# EAGLE board F8OICCNICG2AJKW (EAGLE 5.07)
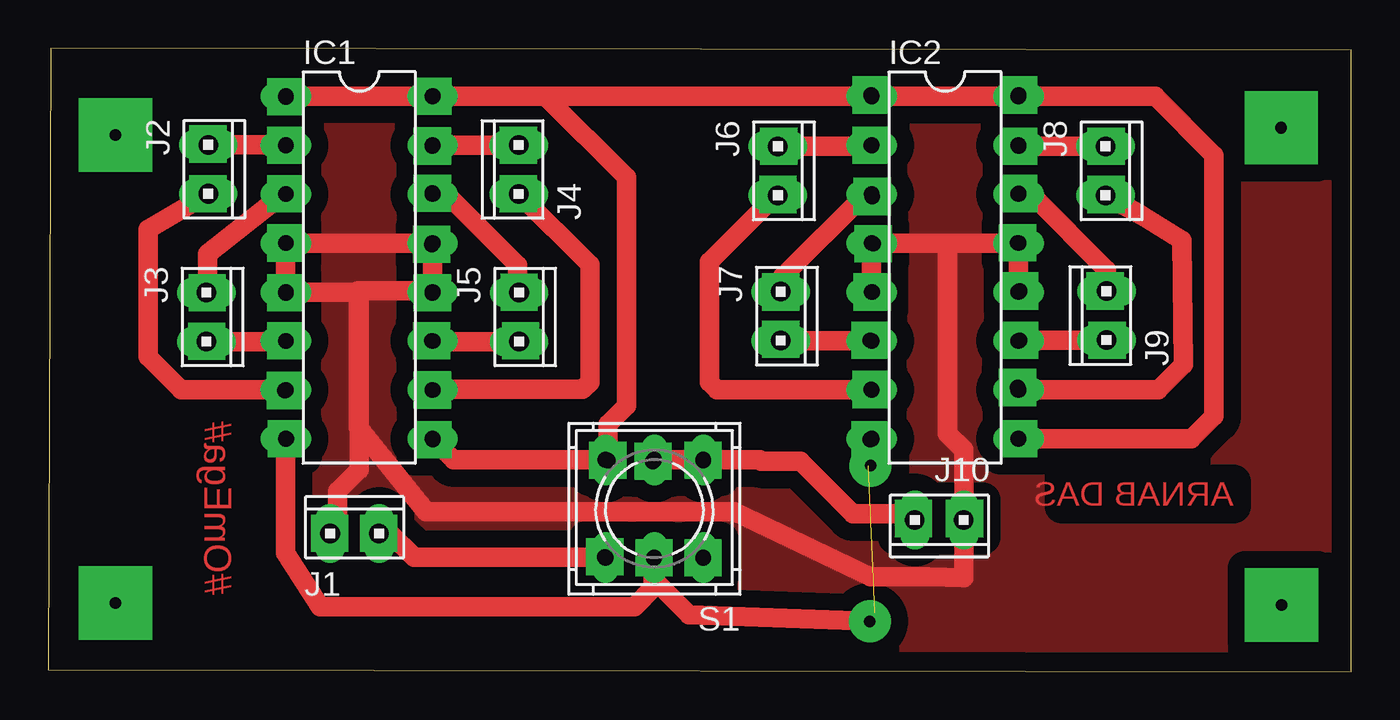
[diagram p0: board, top side]

Size 67.67 x 32.37 mm. Coordinates in mm from the lower left corner, seen from the top.
Outline: 0,0.11 67.67,0 67.66,32.26 0.14,32.37 0,0.11
Copper layers (1*16): Top 0.035mm / dielectric 1.5mm / Bottom 0.035mm
Design rules "default *": minimum track width 10mil, minimum drill 24mil, track to track 35mil, track to pad 35mil, pad to pad 8mil, via to via 8mil, smd to smd 8mil, copper to edge 40mil, drill to drill 8mil, minimum pad ring 10mil, minimum via ring 8mil, stop-mask expansion 4mil, vias tented up to drill 0mil, thermal gap 10mil

## Footprints (pad centres in the part's own frame; a part is rotated, then mirrored left to right if it is on the bottom)
DIL16 = drill 0.813 long: 1 -8.89,-3.81; 2 -6.35,-3.81; 3 -3.81,-3.81; 4 -1.27,-3.81; 5 1.27,-3.81; 6 3.81,-3.81; 7 6.35,-3.81; 8 8.89,-3.81; 9 8.89,3.81; 10 6.35,3.81; 11 3.81,3.81; 12 1.27,3.81; 13 -1.27,3.81; 14 -3.81,3.81; 15 -6.35,3.81; 16 -8.89,3.81
10X02MTA = drill 1.016 long: 1 1.27,0; 2 -1.27,0
9077-2 = drill 0.813 long: 1 -2.54,2.54; 2 0,2.54; 3 2.54,2.54; 4 -2.54,-2.54; 5 0,-2.54; 6 2.54,-2.54

## Placement (x,y rotation side)
IC1  L293D  [DIL16]  16.15,20.98 270 top
IC2  L293D  [DIL16]  46.57,20.98 270 top
J1  1  [10X02MTA]  15.91,7.17 0 top
J2  1  [10X02MTA]  8.31,26.08 270 top
J3  1  [10X02MTA]  8.22,18.41 270 top
J4  1  [10X02MTA]  24.43,26.06 90 top
J5  1  [10X02MTA]  24.45,18.41 270 top
J6  1  [10X02MTA]  37.89,26 270 top
J7  1  [10X02MTA]  38.04,18.46 270 top
J8  1  [10X02MTA]  54.9,26 270 top
J9  1  [10X02MTA]  54.95,18.48 90 top
J10  1  [10X02MTA]  46.27,7.88 180 top
S1  9077-2  [9077-2]  31.48,8.46 180 top

## Library data of the parts
IC1 IC2 = st-microelectronics
J1-J10 = con-amp
S1 = switch-misc

## Nets
GND: IC1.4 IC1.5 IC1.12 IC1.13 IC2.4 IC2.5 IC2.12 IC2.13 J1.2 J10.2
N$2: IC1.2 J2.2
N$3: IC1.7 J2.1
N$4: IC1.3 J3.2
N$5: IC1.6 J3.1
N$6: IC1.8 IC2.8 S1.2
N$7: IC1.1 IC1.9 IC1.16 IC2.1 IC2.9 IC2.16 S1.6
N$8: IC1.11 J5.1
N$9: IC1.14 J5.2
N$10: IC1.15 J4.1
N$11: IC1.10 J4.2
N$12: IC2.2 J6.2
N$13: IC2.7 J6.1
N$14: IC2.3 J7.2
N$15: IC2.6 J7.1
N$16: IC2.10 J8.1
N$17: IC2.15 J8.2
N$18: IC2.14 J9.1
N$19: IC2.11 J9.2
N$21: J1.1 S1.3
N$22: J10.1 S1.5

## Tracks (layer width: path | path; a pad name or v marks a point on that pad's centre or on a via)
GND
  Top 1.016: IC2.5 IC2.4 46.89,22.25 | 46.89,22.25 IC2.13 IC2.12 | 46.89,22.25 46.71,22.07 46.71,12.35 47.54,11.52 J10.2 47.56,7.86 47.56,4.87 45.67,4.94 42.7,4.94 35.65,8.3 19.62,8.3 16.1,12.68 16.1,19.78 16.12,19.77 19.9,19.77 19.96,19.83 IC1.13 | IC1.13 IC1.12 | IC1.13 IC1.4 IC1.5 16.15,19.71 16.15,19.7 16.15,10.48 15.04,9.36 15.04,7.57 J1.2
  pour Top: 0.91,31.29 4.91,31.35 5.71,31.14 63.28,31.59 66.38,31.58 66.75,31.35 66.75,0.66 61.27,0.77 58.2,0.64 0.71,0.76 0.82,5.32 0.91,6.29
N$1  (via drill 0.6 pad 2.18)
  other vias: 42.66,2.62
N$2
  Top 1.016: J2.2 12.32,27.35 IC1.2
N$3
  Top 1.016: J2.1 7.08,24.08 5.2,22.96 5.2,16.34 6.91,14.63 IC1.7
N$4
  Top 1.016: IC1.3 12.11,24.7 8.27,21.69 8.27,20.32 J3.2
N$5
  Top 1.016: J3.1 12.31,17.14 IC1.6
N$6  (1 unrouted)
  Top 1.016: IC1.8 12.34,6.16 14.11,3.38 27.46,3.38 30.44,3.38 31.4,4.35 31.4,5.84 S1.2 31.48,4.76 33.28,2.96 42.7,2.62 42.93,3.07 | IC2.8 42.76,10.87 42.59,10.7
N$7
  Top 1.016: IC1.16 IC1.1 | IC1.16 IC2.1 IC2.16 57.48,29.87 60.53,26.81 60.53,13.25 59.36,12.08 IC2.9 | IC1.9 21.05,11 S1.6 29.07,11.13 29.07,12.85 30.02,13.8 30.02,25.66 25.81,29.87 IC1.16
N$8
  Top 1.016: J5.1 19.99,17.14 IC1.11
N$9
  Top 1.016: IC1.14 20.68,24.79 24.37,21.1 24.37,19.76 J5.2
N$10
  Top 1.016: J4.1 IC1.15
N$11
  Top 1.016: J4.2 24.45,24.79 28.13,21.11 28.13,15.04 27.75,14.66 19.99,14.66 IC1.10
N$12
  Top 1.016: J6.2 42.7,27.27 IC2.2
N$13
  Top 1.016: J6.1 37.79,24.73 34.34,21.28 34.34,15.03 34.74,14.64 IC2.7
N$14
  Top 1.016: IC2.3 42.43,24.79 38.13,20.49 38.13,19.82 J7.2
N$15
  Top 1.016: J7.1 42.74,17.19 IC2.6
N$16
  Top 1.016: J8.1 56.81,23.67 58.88,22.4 58.94,15.93 57.66,14.64 50.39,14.64 IC2.10
N$17
  Top 1.016: J8.2 50.44,27.27 IC2.15
N$18
  Top 1.016: J9.1 54.95,20.87 51.13,24.69 50.48,24.69 IC2.14
N$19
  Top 1.016: J9.2 50.43,17.21 IC2.11
N$21
  Top 1.016: J1.1 17.75,7.17 18.99,5.93 28.92,5.93 S1.3
N$22
  Top 1.016: S1.5 36.95,11 37.03,10.92 39.07,10.92 41.8,8.19 44.69,8.19 J10.1
N$24  (via drill 0.6 pad 3.81)
  other vias: 3.5,27.86
N$25  (via drill 0.6 pad 3.81)
  other vias: 64.03,28.23
N$26  (via drill 0.6 pad 3.81)
  other vias: 3.5,3.58
N$27  (via drill 0.6 pad 3.81)
  other vias: 64.04,3.46
N$28  (via drill 0.6 pad 2.18)
  other vias: 42.71,10.7
N$29  (via drill 0.8 pad 1.93)
  other vias: 12.34,29.84
N$30  (via drill 0.8 pad 1.93)
  other vias: 12.34,27.32
N$31  (via drill 0.8 pad 1.93)
  other vias: 12.34,24.8
N$32  (via drill 0.8 pad 1.93)
  other vias: 8.3,27.39
N$33  (via drill 0.8 pad 1.93)
  other vias: 8.3,24.8
N$34  (via drill 0.8 pad 1.93)
  other vias: 8.26,19.66
N$35  (via drill 0.8 pad 1.93)
  other vias: 8.23,17.14
N$36  (via drill 0.8 pad 1.93)
  other vias: 12.34,22.25
N$37  (via drill 0.8 pad 1.93)
  other vias: 12.34,19.66
N$38  (via drill 0.8 pad 1.93)
  other vias: 12.34,17.18
N$39  (via drill 0.8 pad 1.93)
  other vias: 12.3,14.59
N$40  (via drill 0.8 pad 1.93)
  other vias: 19.99,29.88
N$41  (via drill 0.8 pad 1.93)
  other vias: 19.95,27.29
N$42  (via drill 0.8 pad 1.93)
  other vias: 24.42,27.32
N$43  (via drill 0.8 pad 1.93)
  other vias: 24.42,24.8
N$44  (via drill 0.8 pad 1.93)
  other vias: 19.95,24.84
N$45  (via drill 0.8 pad 1.93)
  other vias: 19.92,22.18
N$46  (via drill 0.8 pad 1.93)
  other vias: 19.95,19.66
N$47  (via drill 0.8 pad 1.93)
  other vias: 24.45,19.7
N$48  (via drill 0.8 pad 1.93)
  other vias: 19.92,17.18
N$49  (via drill 0.8 pad 1.93)
  other vias: 24.52,17.18
N$50  (via drill 0.8 pad 1.93)
  other vias: 19.95,14.63
N$51  (via drill 0.8 pad 1.93)
  other vias: 42.74,29.93
N$52  (via drill 0.8 pad 1.93)
  other vias: 37.94,27.28
N$53  (via drill 0.8 pad 1.93)
  other vias: 37.89,24.77
N$54  (via drill 0.8 pad 1.93)
  other vias: 42.74,27.33
N$55  (via drill 0.8 pad 1.93)
  other vias: 42.79,24.67
N$56  (via drill 0.8 pad 1.93)
  other vias: 42.84,22.22
N$57  (via drill 0.8 pad 1.93)
  other vias: 42.79,19.71
N$58  (via drill 0.8 pad 1.93)
  other vias: 42.69,17.21
N$59  (via drill 0.8 pad 1.93)
  other vias: 42.74,14.65
N$60  (via drill 0.8 pad 1.93)
  other vias: 50.34,22.27
N$61  (via drill 0.8 pad 1.93)
  other vias: 50.39,24.82
N$62  (via drill 0.8 pad 1.93)
  other vias: 50.39,27.28
N$63  (via drill 0.8 pad 1.93)
  other vias: 50.39,29.93
N$64  (via drill 0.8 pad 1.93)
  other vias: 54.94,27.28
N$65  (via drill 0.8 pad 1.93)
  other vias: 54.94,24.77
N$66  (via drill 0.8 pad 1.93)
  other vias: 54.89,19.76
N$67  (via drill 0.8 pad 1.93)
  other vias: 54.99,17.21
N$68  (via drill 0.8 pad 1.93)
  other vias: 50.45,17.21
N$69  (via drill 0.8 pad 1.93)
  other vias: 50.45,19.76
N$70  (via drill 0.8 pad 1.93)
  other vias: 38.04,19.71
N$71  (via drill 0.8 pad 1.93)
  other vias: 38.04,17.26
N$72  (via drill 0.8 pad 1.93)
  other vias: 12.36,12.09
N$73  (via drill 0.8 pad 1.93)
  other vias: 14.61,7.19
N$74  (via drill 0.8 pad 1.93)
  other vias: 17.16,7.19
N$75  (via drill 0.8 pad 1.93)
  other vias: 19.97,12.04
N$76  (via drill 0.8 pad 1.93)
  other vias: 29.06,10.97
N$77  (via drill 0.8 pad 1.93)
  other vias: 31.41,10.92
N$78  (via drill 0.8 pad 1.93)
  other vias: 34.01,10.97
N$79  (via drill 0.8 pad 1.93)
  other vias: 28.9,5.96
N$80  (via drill 0.8 pad 1.93)
  other vias: 31.46,5.91
N$81  (via drill 0.8 pad 1.93)
  other vias: 34.01,5.91
N$82  (via drill 0.8 pad 1.93)
  other vias: 44.93,7.95
N$83  (via drill 0.8 pad 1.93)
  other vias: 47.59,7.95
N$84  (via drill 0.8 pad 1.93)
  other vias: 42.69,12.04
N$85  (via drill 0.8 pad 1.93)
  other vias: 50.39,12.09
N$86  (via drill 0.8 pad 1.93)
  other vias: 50.34,14.75

## Text on the board
Top: #OmEga# | ARNAB DAS